# Altium PCB TestBoardV1.PcbDoc
Units mm, origin at the board's own origin, x right, y up, seen from the top; angles counter-clockwise.
Board outline 108.71 x 95.12 mm, 2 copper layers (Top Layer, Bottom Layer); 22 components, 33 nets, 189 pads, 31 vias.
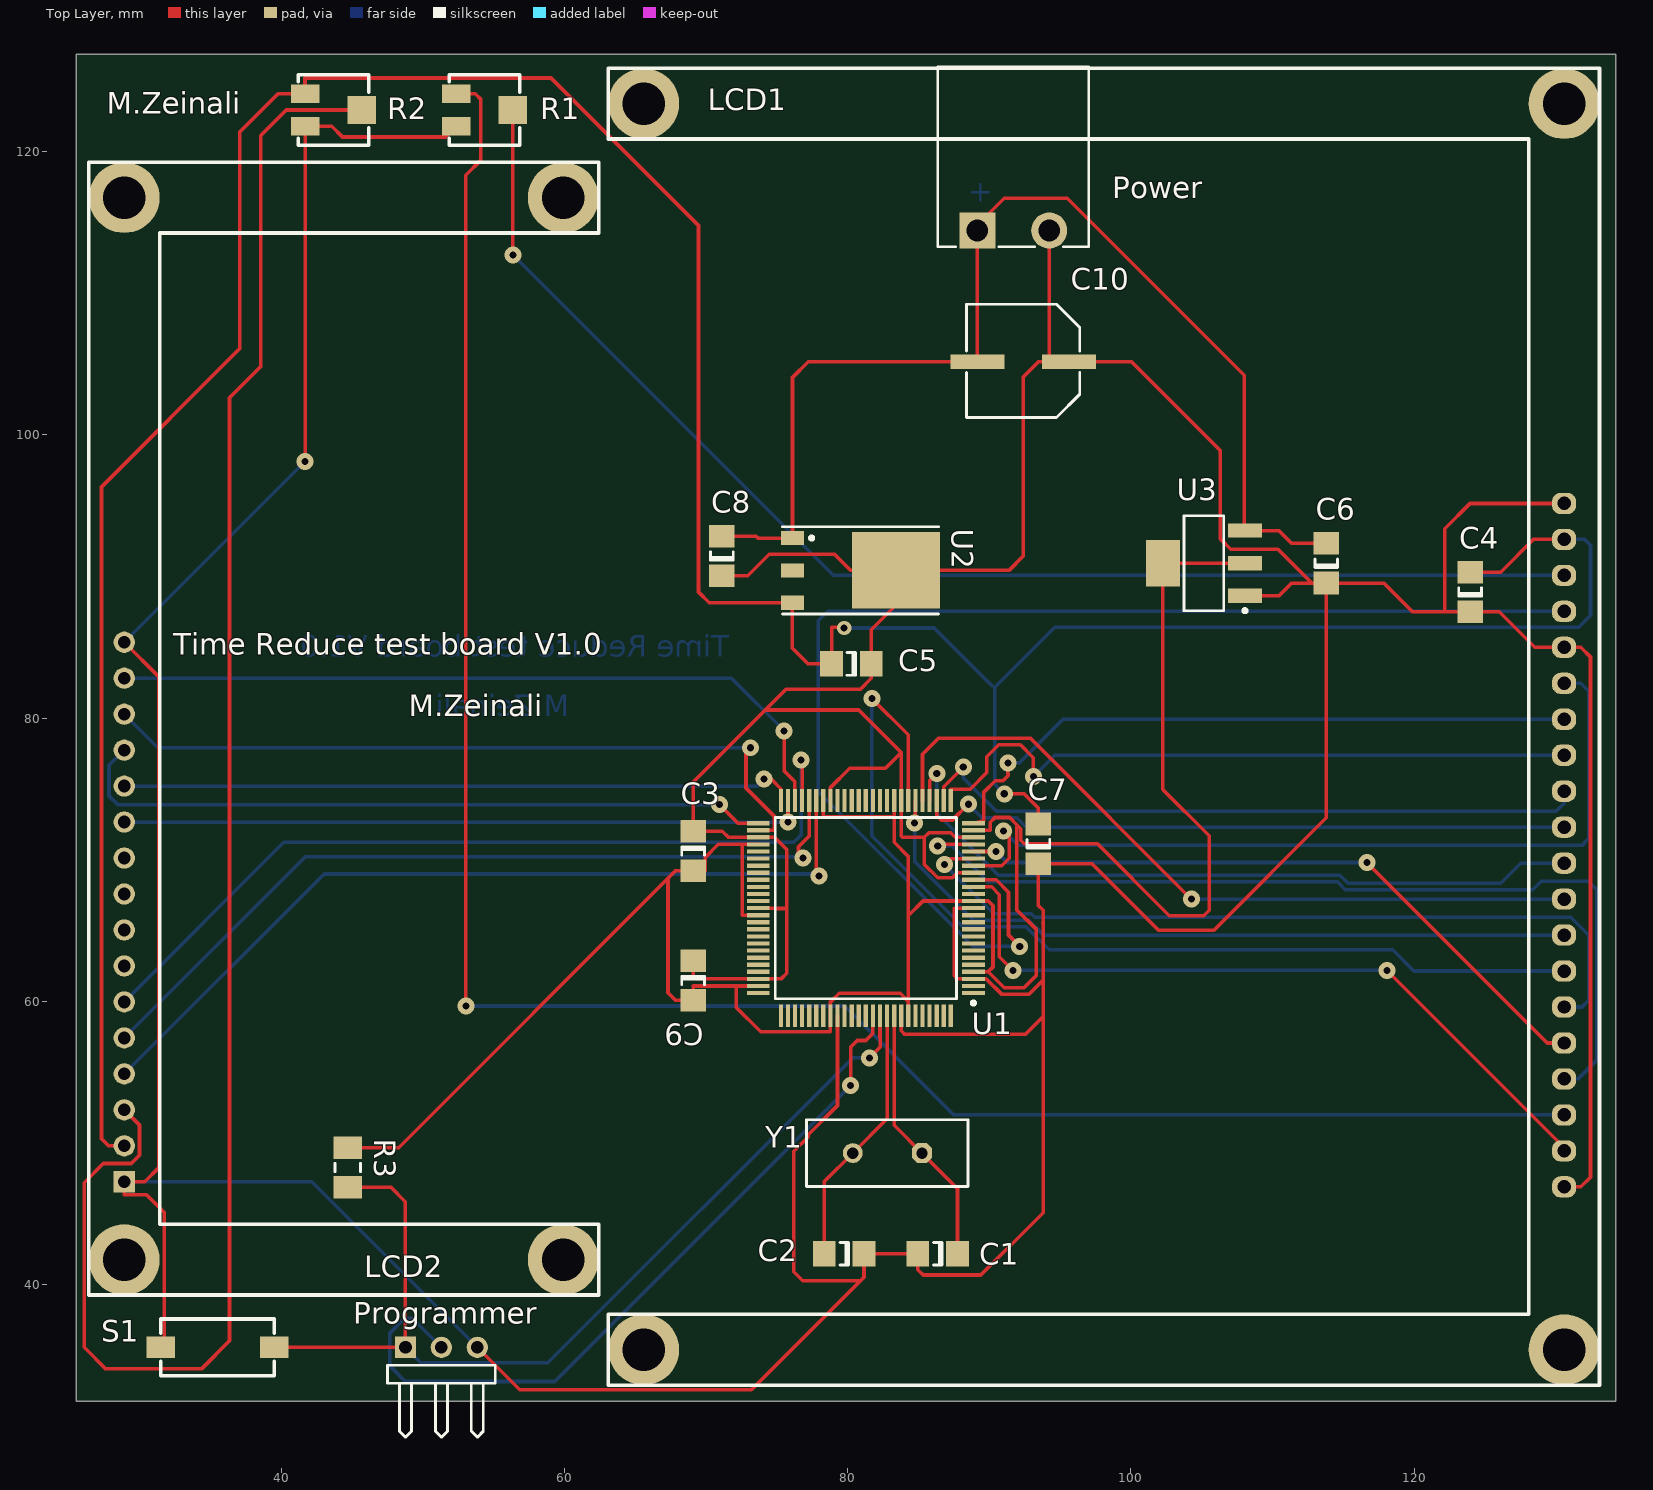
[diagram p0: Top Layer view]
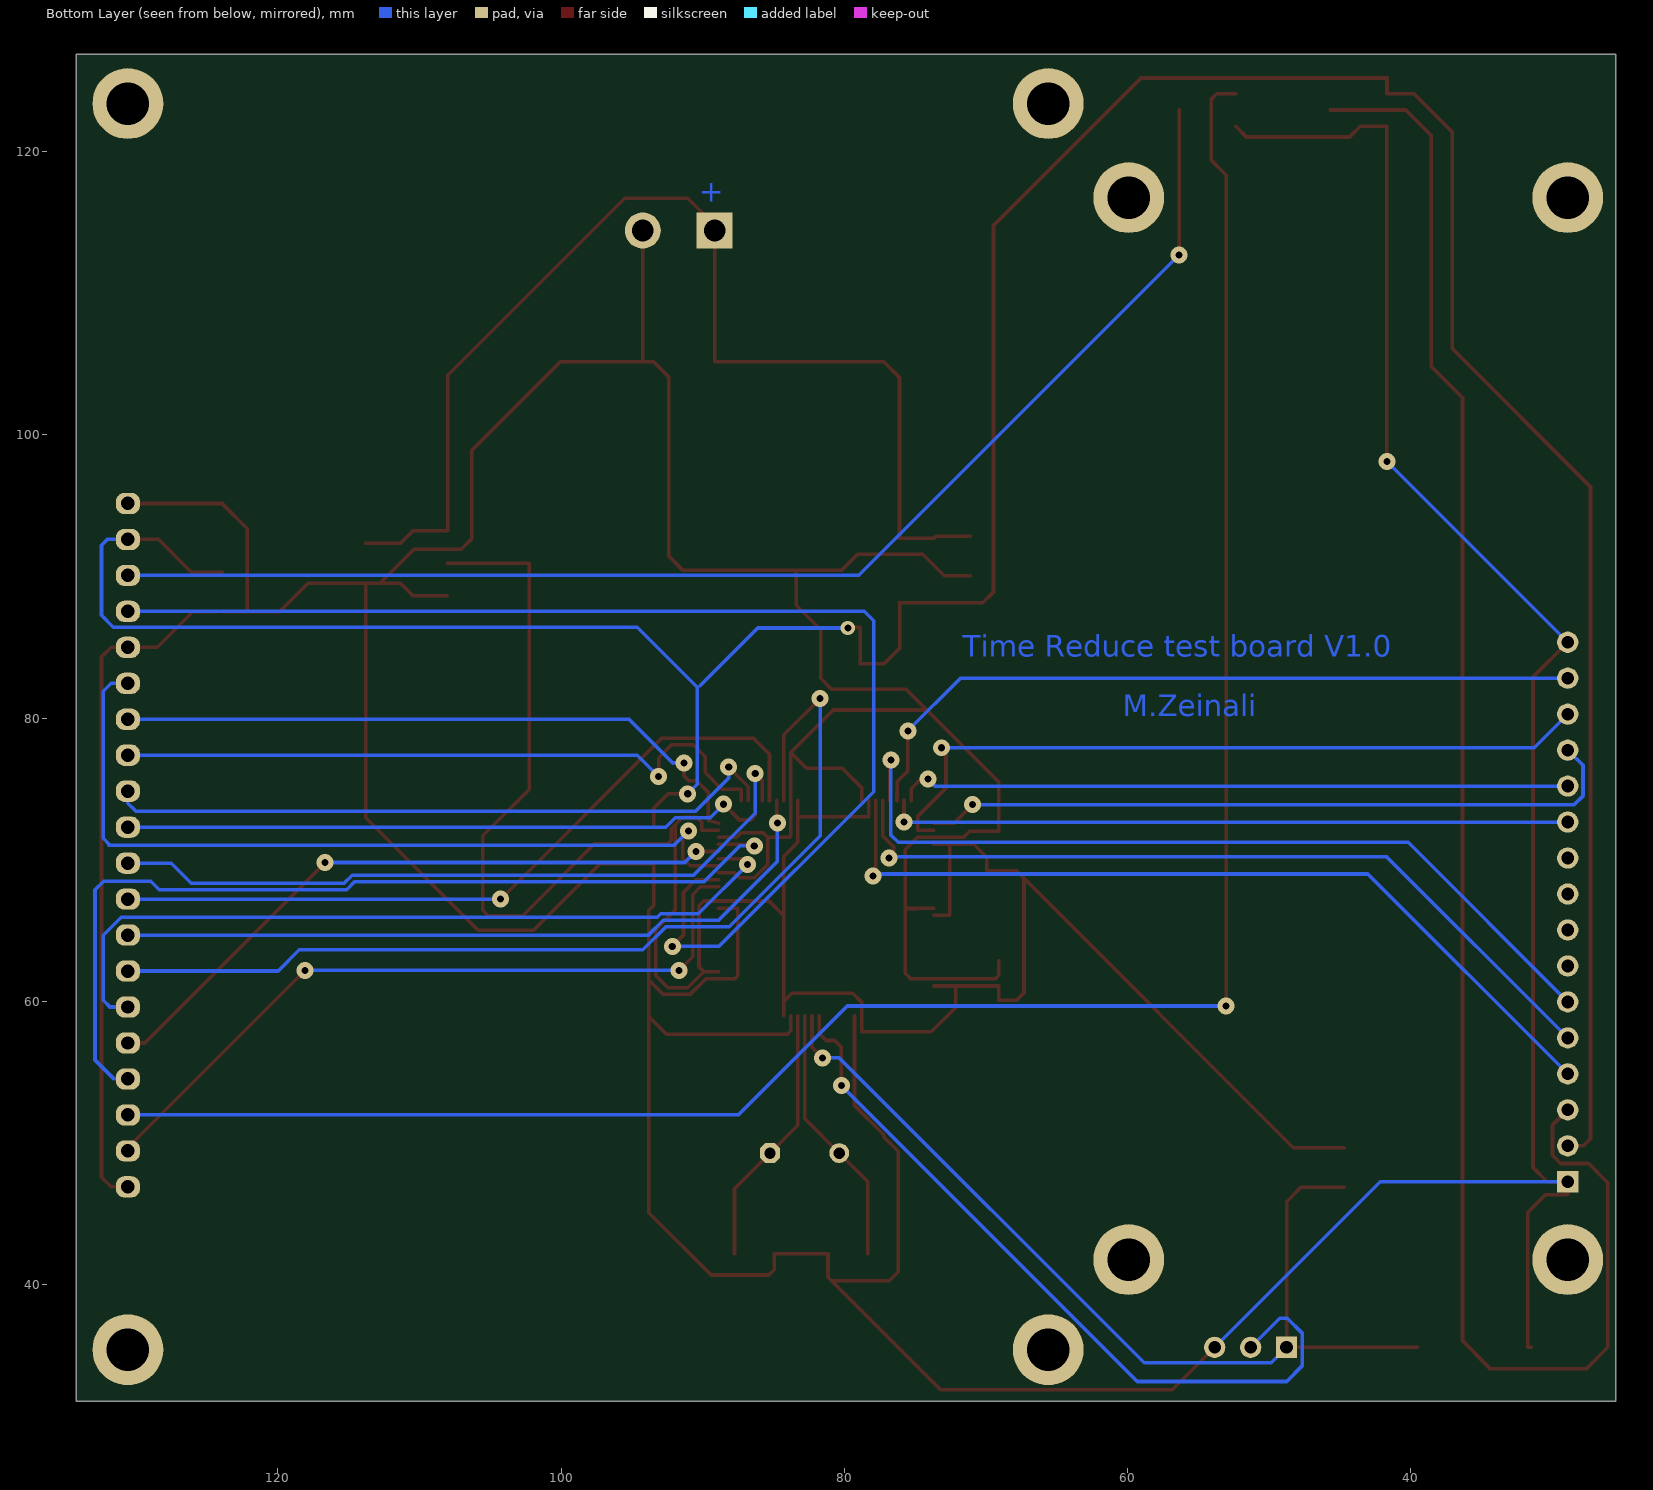
[diagram p1: Bottom Layer view, seen from below]

## Layer stack, top to bottom
Top Layer: signal copper 0.0356
Dielectric: dielectric 0.32, FR-4, Dk 4.8
Bottom Layer: signal copper 0.0356

## Board outline
25.527,126.873 25.527,31.75 133.985,31.75 134.239,31.75 134.239,125.984 134.239,126.873

## Design rules (kind name [scope] priority, off if disabled: settings)
Clearance [All] p1: gap=0.2
HoleSize [All] p1: absolutevalues=TRUE maxlimit=3 minlimit=0.025 maxpercent=80.000 minpercent=20.000
PolygonConnect [All] p1: connectstyle=Relief reliefconductorwidth=0.254 reliefentries=4 polygonreliefangle="90 Angle"
RoutingVias [All] p1: holewidth=0.5 width=1.2 viastyle="Through Hole" minholewidth=0.5 minwidth=1.2 maxholewidth=0.5 maxwidth=1.2
SilkToSilkClearance [All] p1: silktosilkclearance=0
SilkscreenOverComponentPads [All] p1: minsilkscreentomaskgap=0
SolderMaskExpansion [All] p1: expansion=0.102
TestPointUsage [All] p1: valid=0 allowmultiple=FALSE
Testpoint [All] p1: side=15 testpointundercomponent=TRUE minsize=1.016 maxsize=2.54 preferedsize=1.524 minholesize=0 maxholesize=1.016 preferedholesize=0.813 testpointgrid=0.025 style=1023 order=0123456789
Width Power [(InNet('+9V') OR InNet('+5V') OR InNet('GND'))] p1: maxlimit=0.5 minlimit=0.254 preferedwidth=0.254
Width [All] p2: maxlimit=0.254 minlimit=0.254 preferedwidth=0.254
21 further rules are at their usual default settings.

## Components (designator, comment, footprint, x,y, rotation, side; value= is the part's Value field where it differs from the comment)
C1 "Cap Semi" C1206 86.36,42.164 r180 top
C2 "Cap Semi" C1206 79.756,42.164 r180 top
C3 "Cap Semi" C1206 69.088,70.612 r270 top
C4 "Cap Semi" C1206 123.952,88.9 r90 top
C5 "Cap Semi" C1206 80.264,83.82 r180 top
C6 "Cap Semi" C1206 113.792,90.932 r90 top
C7 "Cap Semi" C1206 93.472,71.12 r90 top
C8 "Cap Semi" C1206 71.12,91.44 r90 top
C9 "Cap Semi" C1206 69.088,61.468 r270 top
C10 "100uF" "Cap Pole-100u" 88.392,109.22 r270 top
LCD1 "GLCD 128x64" "GLCD 128X64" 133.096,32.893 r90 top
LCD2 "Charcter LCD16x2" LCD16x2 26.416,119.253 r270 top
Power "2-Pin Terminal" "2-pin Terminal" 97.028,113.284 r180 top
Programmer "Header 3H" HDR1X3H 48.768,35.56 r0 top
R1 "10K" POT4MM-2 54.356,122.936 r0 top
R2 "10K" POT4MM-2 43.688,122.936 r0 top
R3 "Res3" MELF-R3216-1206 44.704,48.26 r270 top
S1 "Reset" SMD_Switch 31.496,35.56 r90 top
U1 "ATxmegaA1" TQFP100 81.28,66.548 r180 top
U2 "MC78M05CDT" 369A-03 79.756,90.424 r270 top
U3 "LM1117MP-3.3" MP04A_N 105.156,90.932 r180 top
Y1 "12MHz" HC-49U 82.804,49.276 r180 top

## Footprints (in the part's own frame and the unit in brackets; to place one, negate y for a bottom-side part, rotate by r counter-clockwise, add the part's x,y. Pads: shape width x height; smd on the part's side, far side on the other; paste and mask are expansions set on the pad)
"2-pin Terminal" [mil]
  rect 100x100 hole 60: 1(310,-45)
  round 100 hole 60: 2(110,-45)
  silkscreen extent 0,-500 420,0
369A-03 [mm] "D-PAK/TO-252-AA; 3 Leads (1 Cropped); Body 10.2 (inc. leads) x 6.7 mm (LxW max)"
  rect 1x1.6 smd: 1(-2.285,-3.65) 2(0,-3.65) 3(2.285,-3.65)
  rect 5.4x6.2 smd: 4(0,3.65)
  silkscreen extent -3.08,-4.35 3.08,6.65
C1206 [mm] "Chip Capacitor; Body 3.2 x 1.6 mm (LxW typ)"
  rect 1.6x1.8 smd: 1(-1.4,0) 2(1.4,0)
  silkscreen extent -0.3,-0.8 0.3,0.8
"Cap Pole-100u" [mil]
  rect 40x150 smd: 1(160,30) 2(160,285)
  silkscreen extent 0,0 315,315
"GLCD 128X64" [mm]
  rrect80% 1.5x1.7 hole 0.95: 1(62.26,2.5) 2(59.72,2.5) 3(57.18,2.5) 4(54.64,2.5) 5(52.1,2.5) 6(49.56,2.5) 7(47.02,2.5) 8(44.48,2.5) 9(41.94,2.5) 10(39.4,2.5) 11(36.86,2.5) 12(34.32,2.5) 13(31.78,2.5) 14(29.24,2.5) 15(26.7,2.5) 16(24.16,2.5) 17(21.62,2.5) 18(19.08,2.5) 19(16.54,2.5) 20(14,2.5)
  round 5 hole 3: 21(2.5,2.5) 22(2.5,67.5) 23(90.5,67.5) 24(90.5,2.5)
  silkscreen extent 0,0 93,70
HC-49U [mm] "Quartz Crystal, Thru-Hole; 2 Leads; Body 11.35 x 4.65 x 13.46 mm (LxWxH max)"
  oct 1.4x1.4 hole 0.8: 1(-2.44,0)
  round 1.4 hole 0.8: 2(2.44,0)
  silkscreen extent -5.7,-2.35 5.7,2.35
HDR1X3H [mm] "Connector; Header; 3 Position; Right Angle"
  rect 1.5x1.5 hole 0.9: 1(0,0)
  round 1.5 hole 0.9: 2(2.54,0) 3(5.08,0)
  silkscreen extent -1.27,-6.35 6.35,-1.27
LCD16x2 [mm]
  rect 1.5x1.5 hole 0.9: 1(72,2.5)
  round 1.5 hole 0.9: 2(69.46,2.5) 3(66.92,2.5) 4(64.38,2.5) 5(61.84,2.5) 6(59.3,2.5) 7(56.76,2.5) 8(54.22,2.5) 9(51.68,2.5) 10(49.14,2.5) 11(46.6,2.5) 12(44.06,2.5) 13(41.52,2.5) 14(38.98,2.5) 15(36.44,2.5) 16(33.9,2.5)
  round 5 hole 3: 17(2.5,33.5) 18(2.5,2.5) 19(77.5,2.5) 20(77.5,33.5)
  silkscreen extent 0,0 80,36
MELF-R3216-1206 [mm] "Metal Electrode Face (MELF) Resistor; Body 3.2 x 1.8 mm (LxDia)"
  rect 1.6x2 smd: 1(-1.4,0) 2(1.4,0)
  silkscreen extent -0.3,-0.9 0.3,0.9
MP04A_N [mm] "SOT223, 4-Leads, Body 6.5x3.5mm, Pitch 2.3mm, Lead Span 7mm, IPC Medium Density"
  rect 2.4x1 smd: 1(-2.9,2.3) 2(-2.9,0) 3(-2.9,-2.3)
  rect 2.4x3.3 smd: 4(2.9,0)
  silkscreen extent -3.03,-3.35 1.4,3.47, body extent -1.85,-3.35 1.85,3.35, height 1.8
POT4MM-2 [mm] "Square Trimming Potentiometer"
  rect 2x1.3 smd: CCW(-2,-1.15) CW(-2,1.15)
  rect 2x2 smd: W(2,0)
  silkscreen extent -2.5,-2.5 2.5,2.5
SMD_Switch [mm]
  rect 1.5x2 smd: 1(0,0) 2(0,-8)
  silkscreen extent -2,-8 2,0
TQFP100 [mm]
  rect 1.6x0.3 smd: 1(-7.604,5.971) 2(-7.604,5.471) 3(-7.604,4.971) 4(-7.604,4.471) 5(-7.604,3.971) 6(-7.604,3.471) 7(-7.604,2.971) 8(-7.604,2.471) 9(-7.604,1.971) 10(-7.604,1.471) 11(-7.604,0.971) 12(-7.604,0.471) 13(-7.604,-0.029) 14(-7.604,-0.529) 15(-7.604,-1.029) 16(-7.604,-1.529) 17(-7.604,-2.029) 18(-7.604,-2.529) 19(-7.604,-3.029) 20(-7.604,-3.529) 21(-7.604,-4.029) 22(-7.604,-4.529) 23(-7.604,-5.029) 24(-7.604,-5.529) 25(-7.604,-6.029) 51(7.596,-6.029) 52(7.596,-5.529) 53(7.596,-5.029) 54(7.596,-4.529) 55(7.596,-4.029) 56(7.596,-3.529) 57(7.596,-3.029) 58(7.596,-2.529) 59(7.596,-2.029) 60(7.596,-1.529) 61(7.596,-1.029) 62(7.596,-0.529) 63(7.596,-0.029) 64(7.596,0.471) 65(7.596,0.971) 66(7.596,1.471) 67(7.596,1.971) 68(7.596,2.471) 69(7.596,2.971) 70(7.596,3.471) 71(7.596,3.971) 72(7.596,4.471) 73(7.596,4.971) 74(7.596,5.471) 75(7.596,5.971)
  rect 0.3x1.6 smd: 26(-6.004,-7.629) 27(-5.504,-7.629) 28(-5.004,-7.629) 29(-4.504,-7.629) 30(-4.004,-7.629) 31(-3.504,-7.629) 32(-3.004,-7.629) 33(-2.504,-7.629) 34(-2.004,-7.629) 35(-1.504,-7.629) 36(-1.004,-7.629) 37(-0.504,-7.629) 38(-0.004,-7.629) 39(0.496,-7.629) 40(0.996,-7.629) 41(1.496,-7.629) 42(1.996,-7.629) 43(2.496,-7.629) 44(2.996,-7.629) 45(3.496,-7.629) 46(3.996,-7.629) 47(4.496,-7.629) 48(4.996,-7.629) 49(5.496,-7.629) 50(5.996,-7.629) 76(5.996,7.571) 77(5.496,7.571) 78(4.996,7.571) 79(4.496,7.571) 80(3.996,7.571) 81(3.496,7.571) 82(2.996,7.571) 83(2.496,7.571) 84(1.996,7.571) 85(1.496,7.571) 86(0.996,7.571) 87(0.496,7.571) 88(-0.004,7.571) 89(-0.504,7.571) 90(-1.004,7.571) 91(-1.504,7.571) 92(-2.004,7.571) 93(-2.504,7.571) 94(-3.004,7.571) 95(-3.504,7.571) 96(-4.004,7.571) 97(-4.504,7.571) 98(-5.004,7.571) 99(-5.504,7.571) 100(-6.004,7.571)
  silkscreen extent -7.73,-6.43 6.4,6.8

## Part data
C1 C2 C3 C4 C5 C6 C7 C8 C9: "Capacitor (Semiconductor SIM Model)"
C10: library part "Cap Pole"
LCD2: library part LCD16x2
Programmer: "Header, 3-Pin, Right Angle"
R1 R2: library part "RPot SM", "Square Trimming Potentiometer"
R3: "Resistor"
S1: library part SW-PB, "Switch"
U1: library part ATxMega_A1, "High Performance 8/16bit MCU"
U2: "3-Terminal Medium-Current Positive Fixed Voltage Regulator"
U3: "800mA Low-Dropout Linear Regulator"
Y1: library part ECS-10-13-1, "Crystal Oscillator"

## Via types
v1: diameter 1.2, hole 0.5, Top Layer to Bottom Layer, 30 vias
v2: diameter 1, hole 0.5, Top Layer to Bottom Layer, 1 vias

## Nets (pads, with @x,y where several pads share a name; then routed paths per layer and width w, separated by ;. In a path a pad name is that pad's centre, name@x,y a point inside that pad or via, vN(x,y) a via of type N, cw(c..) or ccw(c..) an arc to the next point about the centre after c; other vN are vias at no path point)
+3V3: C3.2 C9.2 R3.1 U1.4 U1.14 U1.24 U1.34 U1.44 U1.54 U1.64 U1.74 U1.83 U1.94 U3.2 U3.4 | length 191.2
  Top Layer w0.254: R3.1 48.291,49.66 67.31,68.679 ; U1.64 72.542,66.077 72.542,71.077 ; U1.44 78.284,73.025 83.284,73.025 ; U1.4 89.916,62.077 ; U1.24 90.068,72.077 90.068,72.644 90.399,72.974 91.44,72.974 91.948,72.466 ; U3.2 U3.4 102.256,74.96 105.537,71.679 105.537,66.421 105.156,66.04 102.718,66.04 97.638,71.12 92.481,71.12 92.227,71.374 92.227,72.187 91.948,72.466 ; 67.31,68.679 67.31,60.601 67.843,60.068 C9.2 69.088,61.077 72.227,61.077 ; 67.31,68.679 67.843,69.212 C3.2 69.944,69.212 69.944,70.155 70.866,71.077 72.542,71.077 ; 72.227,61.077 U1.74 72.227,61.077 ; 72.227,61.077 72.136,60.985 72.136,59.563 73.863,57.836 78.784,57.836 U1.83 78.784,59.944 79.398,60.558 83.715,60.558 84.284,59.989 ; 72.542,71.077 U1.54 72.542,71.077 ; 83.284,73.025 U1.34 83.284,73.025 ; 83.284,73.025 83.284,71.222 84.284,70.222 84.284,66.04 ; U1.94 84.284,59.989 ; U1.94 84.284,59.989 ; U1.94 84.284,59.989 ; 84.284,59.989 84.284,66.04 ; 84.284,59.989 84.284,66.04 ; 84.284,66.04 85.321,67.077 U1.14 89.921,67.077 90.262,66.735 90.262,62.423 89.916,62.077 ; 89.916,62.077 89.939,62.077 91.055,60.96 92.456,60.96 93.332,61.836 93.332,65.062 91.948,66.446 91.948,72.466
+5V: C4.2 C5.2 C7.2 LCD1.2 LCD2.2 R2.CW U2.3 | length 241.2
  Top Layer w0.254: LCD2.2 27.804,49.793 27.305,50.292 27.305,96.317 37.059,106.07 37.059,121.368 39.776,124.086 R2.CW@41.681,124.086 ; R2.CW R2.CW@41.681,124.086 ; v2@79.651,86.411 78.864,86.411 C5.2 77.216,83.82 76.098,84.938 U2.3@76.098,88.139 ; v1(91.059,74.651) 92.456,74.651 93.472,73.635 C7.2 ; C4.2 126.111,90.3 128.424,92.613 LCD1.2 ; R2.CW@41.681,124.086 41.681,125.197 59.055,125.197 69.469,114.783 69.469,88.902 70.232,88.139 U2.3@76.098,88.139 ; U2.3@76.098,88.139 U2.3 U2.3@76.098,88.139
  Bottom Layer w0.254: v2(79.756,86.36) 86.106,86.36 90.17,82.296 ; v1(91.059,74.651) 90.386,75.324 90.386,82.182 94.615,86.411 131.623,86.411 132.461,87.249 132.461,92.202 132.05,92.613 LCD1.2
+9V: C6.2 C8.2 C10.1 Power.1 U2.1 U3.3 | length 90.8
  Top Layer w0.254: C8.2 73.533,92.84 73.664,92.709 U2.1 76.106,104.046 77.216,105.156 C10.1 ; C6.2 111.365,92.332 110.465,93.232 U3.3 108.001,93.232 108.001,104.216 95.504,116.713 91.059,116.713 89.154,114.808 Power.1 ; C10.1 Power.1 ; C10.1 Power.1
GND: C1.2 C2.1 C3.1 C4.1 C5.1 C6.1 C7.1 C8.1 C9.1 C10.2 LCD1.1 LCD1.5 LCD1.20 LCD2.1 LCD2.16 Power.2 Programmer.3 R1.CCW R2.CCW S1.1 U1.3 U1.13 U1.18 U1.23 U1.33 U1.43 U1.53 U1.63 U1.73 U1.84 U1.93 U2.4 U3.1 | length 559.1
  Top Layer w0.254: LCD2.16 31.369,82.9 31.369,48.26 30.362,47.253 LCD2.1 28.916,46.33 30.48,46.33 31.75,45.06 31.75,35.56 S1.1 ; v1(41.688,98.125) R2.CCW 43.568,121.786 44.323,121.031 51.601,121.031 R1.CCW ; Programmer.3 56.845,32.563 73.206,32.563 80.901,40.258 ; C9.1 69.088,61.831 69.342,61.577 U1.73 75.293,61.577 75.692,61.976 75.692,66.548 ; C8.1 72.946,90.04 74.473,91.567 79.07,91.567 80.213,90.424 U2.4 ; U1.63 74.828,66.577 74.857,66.548 75.692,66.548 ; U1.43 78.784,75.089 80.149,76.454 82.669,76.454 83.784,77.569 ; U1.84 79.284,52.64 77.216,50.571 77.216,50.419 76.2,49.403 76.2,40.894 76.836,40.258 80.901,40.258 ; U1.93 83.784,57.912 84.038,57.658 92.532,57.658 93.802,58.928 ; U1.13 87.532,66.577 87.532,61.802 87.757,61.577 U1.3 89.797,61.577 90.867,60.506 92.824,60.506 93.799,61.481 93.799,65.503 93.786,65.516 ; U1.18 87.757,69.077 87.4,68.72 86.36,68.72 85.419,69.661 85.419,71.577 ; U1.23 87.6,71.577 87.273,71.904 85.746,71.904 85.419,71.577 ; Power.2 C10.2@94.234,105.156 ; U3.1 110.465,88.632 111.365,89.532 112.776,89.532 ; C4.1 122.174,87.5 ; C4.1@124.361,87.5 126.009,87.5 128.516,84.993 LCD1.5 131.775,84.993 132.461,84.307 132.461,47.579 131.775,46.893 LCD1.20 ; LCD1.1 123.952,95.153 122.174,93.375 122.174,87.5 ; 74.179,80.569 80.785,80.569 83.784,77.569 ; 74.179,80.569 75.652,82.042 80.902,82.042 81.664,82.804 C5.1 81.664,86.233 83.406,87.975 U2.4 ; 74.179,80.569 69.088,75.478 C3.1 71.145,72.012 71.581,71.577 U1.53 74.828,71.577 75.692,70.713 75.692,66.548 ; 80.901,40.258 81.156,40.513 C2.1 C1.2 84.96,41.049 85.344,40.665 89.408,40.665 93.802,45.06 93.802,58.928 ; U2.4 91.389,90.424 92.405,91.44 92.405,104.089 93.472,105.156 C10.2@94.234,105.156 ; 83.784,77.569 83.784,75.311 U1.33 83.784,71.65 83.857,71.577 85.419,71.577 ; 93.472,66.751 93.802,66.421 93.802,66.116 93.802,58.928 ; 93.472,66.751 C7.1 ; 93.472,66.751 C7.1 ; 93.472,66.751 C7.1 ; C7.1 97.257,69.72 101.953,65.024 105.864,65.024 113.792,72.952 C6.1 ; C10.2@94.234,105.156 C10.2 ; C10.2@94.234,105.156 C10.2 ; C10.2 100.051,105.156 106.299,98.908 106.299,92.685 107.061,91.923 110.385,91.923 112.776,89.532 ; 112.776,89.532 C6.1 ; C6.1 117.856,89.532 119.888,87.5 122.174,87.5
  Bottom Layer w0.254: LCD2.1 42.155,47.253 Programmer.3 ; LCD2.16 v1(41.688,98.125)
NetLCD1_3: LCD1.3 R1.W | length 93.8
  Top Layer w0.254: v1(56.356,112.706) R1.W
  Bottom Layer w0.254: v1(56.356,112.706) 78.989,90.073 LCD1.3
NetLCD1_4: LCD1.4 U1.17 | length 90.7
  Top Layer w0.254: U1.17 90.484,68.577 91.357,67.703 91.357,64.675 v1(92.151,63.881)
  Bottom Layer w0.254: v1(92.151,63.881) 88.849,63.881 77.927,74.803 77.927,86.868 78.592,87.533 LCD1.4
NetLCD1_6: LCD1.6 U1.19 | length 59.2
  Top Layer w0.254: U1.19 90.884,69.577 91.411,70.104 91.411,71.631 v1(91.008,72.034)
  Bottom Layer w0.254: v1(91.008,72.034) 92.024,71.018 131.928,71.018 131.928,71.095 132.334,71.501 132.334,81.894 131.775,82.453 LCD1.6
NetLCD1_7: LCD1.7 U1.25 | length 46.4
  Top Layer w0.254: U1.25 89.624,72.767 89.624,74.778 90.424,75.578 90.97,75.578 91.338,75.946 91.338,76.048 91.313,76.073 v1(91.313,76.835)
  Bottom Layer w0.254: v1(91.313,76.835) 92.104,76.835 92.115,76.824 95.204,79.913 LCD1.7
NetLCD1_8: LCD1.8 U1.26 | length 48.4
  Top Layer w0.254: U1.26 87.284,74.981 88.658,74.981 89.833,76.156 89.833,77.26 90.678,78.105 92.202,78.105 93.11,77.197 v1(93.11,75.863)
  Bottom Layer w0.254: v1(93.11,75.863) 94.62,77.373 LCD1.8
NetLCD1_9: LCD1.9 U1.27 | length 48.2
  Top Layer w0.254: U1.27 86.784,75.151 v1(88.163,76.53)
  Bottom Layer w0.254: v1(88.163,76.53) 88.163,75.768 90.5,73.431 130.048,73.431 130.596,73.979 LCD1.9
NetLCD1_10: LCD1.10 U1.28 | length 46.6
  Top Layer w0.254: U1.28 86.284,73.126 86.614,72.796 87.401,72.796 v1(88.519,73.914)
  Bottom Layer w0.254: v1(88.519,73.914) 89.472,72.961 91.935,72.961 92.604,72.293 LCD1.10
NetLCD1_11: LCD1.11 U1.29 | length 51.9
  Top Layer w0.254: U1.29 85.784,75.565 v1(86.292,76.073)
  Bottom Layer w0.254: v1(86.292,76.073) 86.292,73.27 90.656,68.907 114.755,68.907 115.336,68.326 126.11,68.326 127.537,69.753 LCD1.11
NetLCD1_12: LCD1.12 U1.30 | length 53.7
  Top Layer w0.254: U1.30 85.284,77.436 86.408,78.559 92.925,78.559 v1(104.271,67.213)
  Bottom Layer w0.254: v1(104.271,67.213) LCD1.12
NetLCD1_13: LCD1.13 U1.31 | length 52.3
  Top Layer w0.254: v1(84.734,72.593) 84.784,72.643 U1.31
  Bottom Layer w0.254: v1(84.734,72.593) 84.734,69.868 88.883,65.719 92.784,65.719 93.83,64.673 LCD1.13
NetLCD1_14: LCD1.14 U1.32 | length 70.8
  Top Layer w0.254: v1(81.712,81.382) 84.284,78.809 U1.32
  Bottom Layer w0.254: v1(81.712,81.382) 81.712,71.679 88.125,65.265 92.596,65.265 94.234,63.627 118.491,63.627 119.985,62.133 LCD1.14
NetLCD1_15: LCD1.15 U1.20 | length 56.3
  Top Layer w0.254: v1(86.843,69.647) 87.273,70.077 U1.20
  Bottom Layer w0.254: v1(86.843,69.647) 90.316,66.173 92.972,66.173 93.207,65.938 131.064,65.938 132.334,64.668 132.334,60.071 131.856,59.593 LCD1.15
NetLCD1_16: LCD1.16 U1.21 | length 47.3
  Top Layer w0.254: U1.21 90.465,70.577 v1(90.475,70.587) ; v1(116.667,69.799) 129.413,57.053 LCD1.16
  Bottom Layer w0.254: v1(90.475,70.587) 91.262,69.799 v1(116.667,69.799)
NetLCD1_17: LCD1.17 U1.22 | length 65.8
  Top Layer w0.254: v1(86.36,70.968) 86.469,71.077 U1.22
  Bottom Layer w0.254: v1(86.36,70.968) 87.376,70.968 89.891,68.453 114.567,68.453 115.148,67.872 128.375,67.872 128.981,68.478 132.309,68.478 132.915,67.872 132.915,55.856 131.572,54.513 LCD1.17
NetLCD1_18: LCD1.18 R1.CW | length 147.1
  Top Layer w0.254: R1.CW 53.696,124.086 54.102,123.68 54.102,119.405 53.035,118.339 v1(53.035,59.665)
  Bottom Layer w0.254: v1(53.035,59.665) 79.799,59.665 87.491,51.973 LCD1.18
NetLCD1_19: LCD1.19 U1.16 | length 52.1
  Top Layer w0.254: U1.16 90.165,68.077 90.716,67.526 90.716,63.132 v1(91.669,62.179) ; v1(118.074,62.179) 130.596,49.657 LCD1.19
  Bottom Layer w0.254: v1(91.669,62.179) v1(118.074,62.179)
NetLCD2_3: LCD2.3 R2.W | length 125.6
  Top Layer w0.254: LCD2.3 29.993,51.256 29.993,49.119 29.413,48.539 27.432,48.539 26.086,47.193 26.086,35.56 27.61,34.036 34.366,34.036 36.347,36.017 36.347,102.616 38.557,104.826 38.557,121.133 40.361,122.936 R2.W
NetLCD2_4: LCD2.4 U1.45 | length 59.9
  Top Layer w0.254: v1@77.784,69.028 77.784,69.742 U1.45
  Bottom Layer w0.254: LCD2.4 43.029,68.986 v1@77.826,68.986
  other v1: 77.978,68.834
NetLCD2_5: LCD2.5 U1.46 | length 57.8
  Top Layer w0.254: v1(76.835,70.104) 76.53,70.409 76.53,70.917 77.284,71.671 U1.46
  Bottom Layer w0.254: LCD2.5 41.709,70.206 76.733,70.206 v1(76.835,70.104)
NetLCD2_6: LCD2.6 U1.47 | length 60.9
  Top Layer w0.254: v1(76.715,77.029) 76.784,76.96 U1.47
  Bottom Layer w0.254: LCD2.6 40.185,71.222 76.2,71.222 76.715,71.737 v1(76.715,77.029)
NetLCD2_11: LCD2.11 U1.49 | length 48.4
  Top Layer w0.254: v1(75.784,72.653) U1.49
  Bottom Layer w0.254: LCD2.11 v1(75.784,72.653)
NetLCD2_12: LCD2.12 U1.50 | length 47.7
  Top Layer w0.254: v1(74.092,75.692) 74.6,75.692 75.284,75.008 U1.50
  Bottom Layer w0.254: LCD2.12 73.593,75.193 v1(74.092,75.692)
NetLCD2_13: LCD2.13 U1.51 | length 50.3
  Top Layer w0.254: v1(70.942,73.889) 72.254,72.577 U1.51
  Bottom Layer w0.254: LCD2.13 27.838,76.655 27.838,74.498 28.448,73.889 v1(70.942,73.889)
NetLCD2_14: LCD2.14 U1.52 | length 53.2
  Top Layer w0.254: v1(73.152,77.902) 72.822,77.572 72.822,75.057 74.828,73.05 74.828,72.077 U1.52
  Bottom Layer w0.254: LCD2.14 31.287,77.902 v1(73.152,77.902)
NetLCD2_15: LCD2.15 U1.48 | length 53.4
  Top Layer w0.254: v1(75.514,79.096) 75.514,76.261 76.261,75.514 76.261,74.851 76.284,74.828 U1.48
  Bottom Layer w0.254: LCD2.15 71.797,82.813 v1(75.514,79.096)
NetProgrammer_1: Programmer.1 R3.2 S1.2 U1.90 | length 69.5
  Top Layer w0.254: S1.2 Programmer.1 48.768,45.844 47.752,46.86 R3.2 ; v1(81.534,56.007) 82.296,56.769 82.296,57.406 82.284,57.418 U1.90
  Bottom Layer w0.254: Programmer.1 49.86,34.468 58.826,34.468 80.376,56.017 ; 80.386,56.007 v1(81.534,56.007)
NetProgrammer_2: Programmer.2 U1.89 | length 54.8
  Top Layer w0.254: v1(80.213,54.051) 80.213,56.769 80.674,57.23 81.28,57.23 81.784,57.734 U1.89
  Bottom Layer w0.254: Programmer.2 49.251,37.617 48.717,37.617 47.676,36.576 47.676,34.239 48.768,33.147 59.309,33.147 v1(80.213,54.051)
XTAL1: C1.1 U1.92 Y1.1 | length 18.7
  Top Layer w0.254: U1.92 83.284,51.236 Y1.1 87.76,46.76 C1.1
XTAL2: C2.2 U1.91 Y1.2 | length 18.6
  Top Layer w0.254: C2.2 78.356,47.268 Y1.2 82.784,51.696 U1.91
pads on no net: LCD1.21 LCD1.22 LCD1.23 LCD1.24 LCD2.7 LCD2.8 LCD2.9 LCD2.10 LCD2.17 LCD2.18 LCD2.19 LCD2.20 U1.1 U1.2 U1.5 U1.6 U1.7 U1.8 U1.9 U1.10 U1.11 U1.12 U1.15 U1.35 U1.36 U1.37 U1.38 U1.39 U1.40 U1.41 U1.42 U1.55 U1.56 U1.57 U1.58 U1.59 U1.60 U1.61 U1.62 U1.65 U1.66 U1.67 U1.68 U1.69 U1.70 U1.71 U1.72 U1.75 U1.76 U1.77 U1.78 U1.79 U1.80 U1.81 U1.82 U1.85 U1.86 U1.87 U1.88 U1.95 U1.96 U1.97 U1.98 U1.99 U1.100 U2.2

## Other copper
Bottom Layer:
  text "+" at 88.519,116.459 h1.52
  text "Time Reduce test board V1.0" at 71.628,84.328 h1.52
  text "M.Zeinali" at 60.325,80.137 h1.52

## Silkscreen, mask and mechanical layers (free items; w line width, h text height)
Top Overlay:
  text "M.Zeinali" at 27.686,122.682 h1.52
  text "Time Reduce test board V1.0" at 32.385,84.455 h1.52
  text "M.Zeinali" at 49.022,80.137 h1.52